# Altium PCB PCB1.PcbDoc
Units mm, origin at the board's own origin, x right, y up, seen from the top; angles counter-clockwise.
Board outline 100 x 50 mm, 2 copper layers (Top Layer, Bottom Layer); 25 components, 24 nets, 124 pads, 0 vias.
Unrouted connection lines stored in the file: 72.
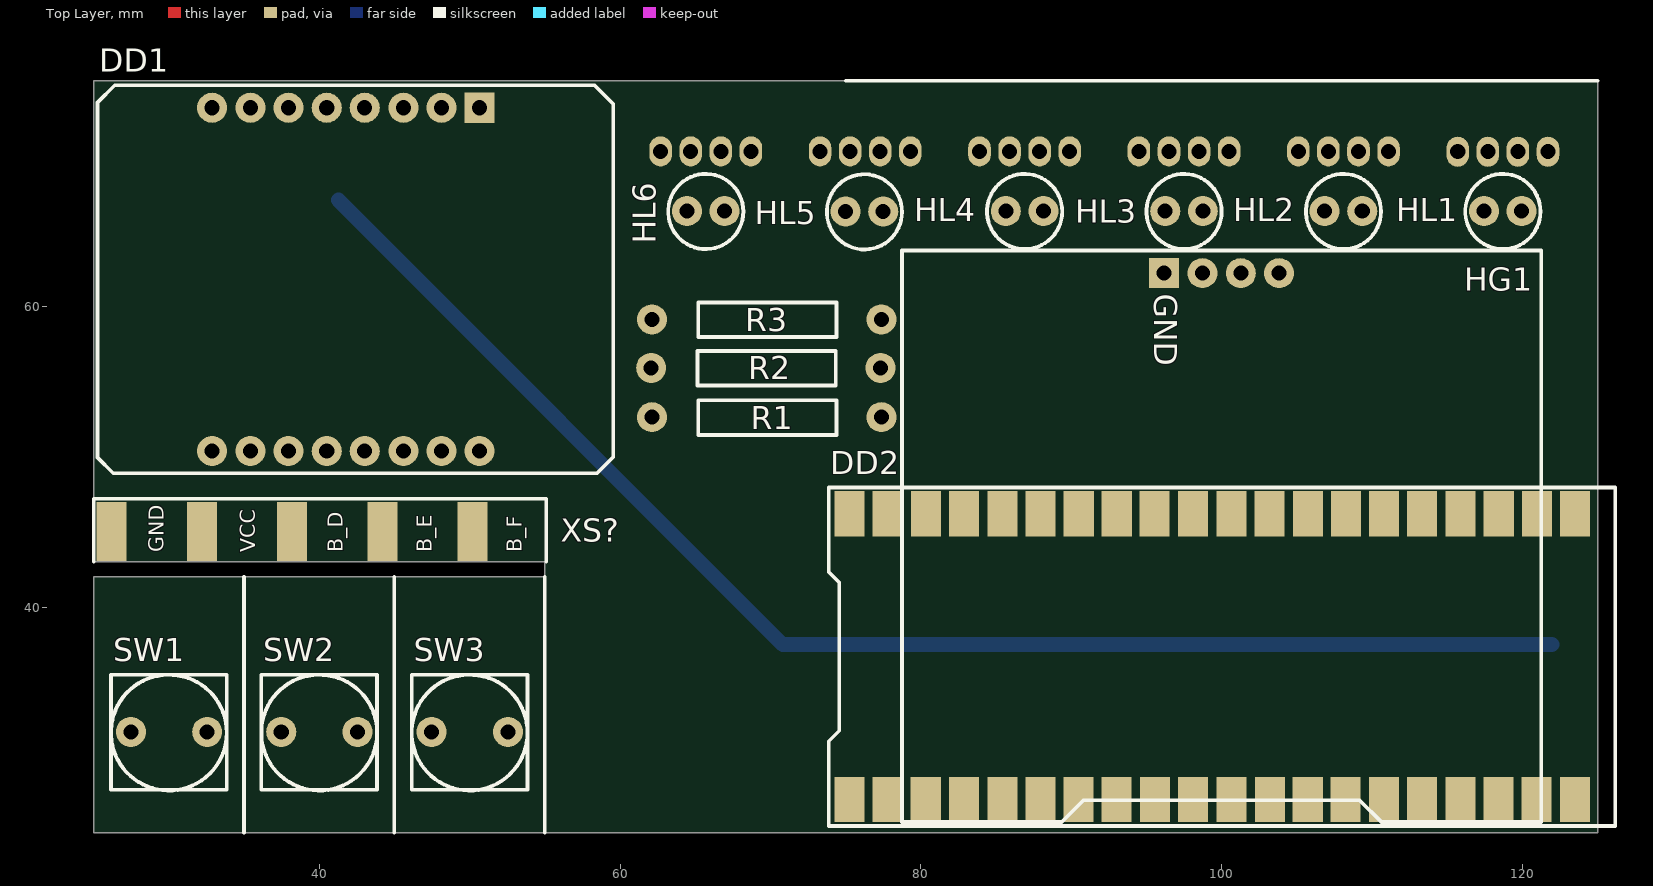
[diagram p0: Top Layer view]
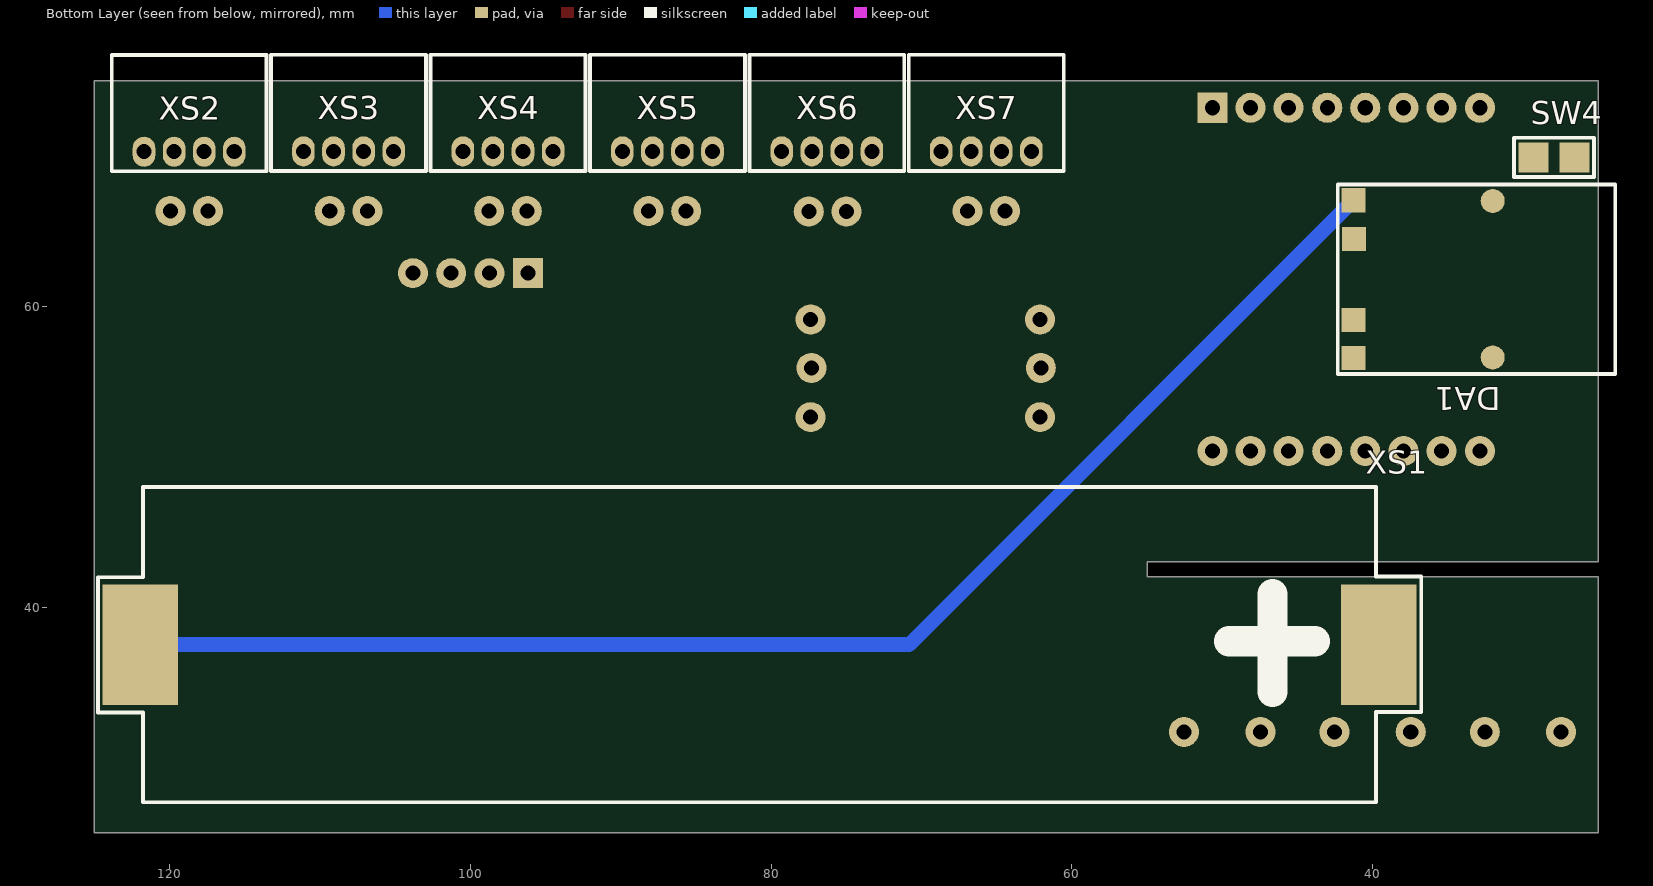
[diagram p1: Bottom Layer view, seen from below]

## Layer stack, top to bottom
Top Solder: solder mask 0.0102, Solder Resist, Dk 3.5
Top Layer: signal copper 0.0356
Dielectric 1: dielectric 0.32, FR-4, Dk 4.8
Bottom Layer: signal copper 0.0356
Bottom Solder: solder mask 0.0102, Solder Resist, Dk 3.5

## Board outline
25,25 25,42 55,42 55,43 25,43 25,75 125,75 125,25

## Design rules (kind name [scope] priority, off if disabled: settings)
Clearance [All] p1: gap=0 ignorepadtopadclearanceinfootprint=FALSE
PolygonConnect [All] p1: connectstyle=Relief reliefconductorwidth=0.254 reliefentries=4 polygonreliefangle="90 Angle" airgapwidth=0.254
RoutingVias [All] p1: holewidth=0.711 width=1.27 viastyle="Through Hole" minholewidth=0.711 minwidth=1.27 maxholewidth=0.711 maxwidth=1.27
SolderMaskExpansion [All] p1: expansion=0.102 istentingtop=FALSE
SupplyNets "Schematic Supply Nets_2" [InNet('GND')] p1: voltage=0.000
SupplyNets "Schematic Supply Nets_1" [InNet('+5V')] p2: voltage=0.000
SupplyNets "Schematic Supply Nets" [InNet('+3.3V')] p3: voltage=0.000
Width [All] p1: maxlimit=1 minlimit=0.3 preferedwidth=0.5 minimp=50.000000 maximp=50.000000 favimp=50.000000
30 further rules are at their usual default settings.

## Components (designator, comment, footprint, x,y, rotation, side; value= is the part's Value field where it differs from the comment)
DA1 "1S 4057 BMS USB C" TP4057 32.8,61.8 r0 bottom
DD1 "ESPWemos" WEMOS 42.4,61.8 r270 top
DD2 "Raspberry Pi Pico" raspberryPiPico 99.375,36.7 r0 top
HG1 "Oled I2C" OledI2C 100,44.7 r0 top
HL1 "led" LED 118.7,66.3 r0 top
HL2 "led" LED 108.1,66.3 r0 top
HL3 "led" LED 97.5,66.3 r0 top
HL4 "led" LED 86.9,66.3 r0 top
HL5 "led" LED 76.25,66.275 r0 top
HL6 "led" LED 65.7,66.3 r0 top
R1 "resistor" Resistor 69.8,52.6 r90 top
R2 "resistor" Resistor 69.747,55.877 r90 top
R3 "resistor" Resistor 69.8,59.1 r90 top
SW1 "button" button 30,31.65 r0 top
SW2 "button" button 40,31.65 r0 top
SW3 "button" button 50,31.65 r0 top
SW4 "button" PowerButton 26.6,69.9 r0 bottom
XS1 "Power" 18650РHolder 80.775,37.525 r270 bottom
XS2 "I2C" "gpio4 v2" 117.9,70.3 r180 bottom
XS3 "I2C" "gpio4 v2" 107.3,70.325 r180 bottom
XS4 "I2C" "gpio4 v2" 96.7,70.325 r180 bottom
XS5 "I2C" "gpio4 v2" 86.1,70.325 r180 bottom
XS6 "I2C" "gpio4 v2" 75.5,70.325 r180 bottom
XS7 "I2C" "gpio4 v2" 64.9,70.325 r180 bottom
XS? "Connector" ConnectionModule 26.2,45 r0 top

## Footprints (in the part's own frame and the unit in brackets; to place one, negate y for a bottom-side part, rotate by r counter-clockwise, add the part's x,y. Pads: shape width x height; smd on the part's side, far side on the other; paste and mask are expansions set on the pad)
18650РHolder [mm]
  rect 8x5 smd: 1(0.025,41.175) 2(0.025,-41.175)
  silkscreen extent -10.45,-44 10.5,44, body extent -10.3,-43.32 10.35,43.33, height 23.06
button [mm]
  round 2 hole 1: 1(-2.525,0.05) 2(2.55,0.05)
  silkscreen extent -3.85,-3.85 3.85,3.85
ConnectionModule [mm]
  rect 2x4 smd: 1(0,0) 2(6,0) 3(12,0) 4(18,0) 5(24,0)
  silkscreen extent -1.2,-2 28.9,2.2
"gpio4 v2" [mm]
  oval 1.5x2 hole 1: 1(-3.8,-0.025) 2(-1.8,-0.025) 3(0.2,-0.025) 4(2.2,-0.025)
  silkscreen extent -5.95,-1.33 4.35,6.4, body extent -5.8,-0.28 4.2,6.22, height 4.65
LED [mm]
  round 2 hole 1: 1(-1.25,0.025) 2(1.25,0.025)
  silkscreen extent -2.5,-2.5 2.5,2.5, body extent -2.5,-0.97 2.5,1.03, height 9.24
OledI2C [mm]
  rect 2x2 hole 1: 1(-3.825,17.5)
  round 2 hole 1: 2(-1.275,17.5) 3(1.275,17.5) 4(3.825,17.5) ""(1.275,17.5)
  silkscreen extent -21.25,-19 21.25,19, body extent -21.25,-19 21.25,19, height 20.1
PowerButton [mm]
  rect 2x2 smd: 1(0,0) 2(2.7,0)
  silkscreen extent -1.3,-1.3 4,1.3
raspberryPiPico [mm]
  rect 2x3 smd: 1(24.125,-9.5) 2(21.575,-9.5) 3(19.025,-9.5) 4(16.5,-9.5) 5(13.95,-9.5) 6(11.425,-9.5) 7(8.875,-9.5) 8(6.35,-9.5) 9(3.85,-9.5) 10(1.275,-9.5) 11(-1.275,-9.5) 12(-3.8,-9.5) 13(-6.375,-9.5) 14(-8.9,-9.5) 15(-11.425,-9.5) 16(-13.95,-9.5) 17(-16.5,-9.5) 18(-19.05,-9.5) 19(-21.6,-9.5) 20(-24.125,-9.5) 21(-24.125,9.5) 22(-21.575,9.5) 23(-19.025,9.5) 24(-16.5,9.5) 25(-13.95,9.5) 26(-11.425,9.5) 27(-8.875,9.5) 28(-6.35,9.5) 29(-3.85,9.5) 30(-1.275,9.5) 31(1.275,9.5) 32(3.8,9.5) 33(6.375,9.5) 34(8.9,9.5) 35(11.425,9.5) 36(13.95,9.5) 37(16.5,9.5) 38(19.05,9.5) 39(21.6,9.5) 40(24.125,9.5)
  silkscreen extent -25.5,-11.25 26.8,11.25, body extent -25.5,-10.5 26.8,10.5, height 4
Resistor [mm]
  round 2 hole 1: 1(0.025,7.675) 2(0.025,-7.575)
  silkscreen extent -1.15,-4.6 1.15,4.6, body extent -1.14,-7.92 1.15,7.92, height 2.3
TP4057 [mm]
  rect 1.6x1.6 smd: 1(8.475,5.25) 2(8.475,2.7) 3(8.45,-2.675) 4(8.475,-5.25)
  round 1.6 smd: 5(-0.775,5.2) 6(-0.775,-5.2)
  silkscreen extent -8.93,-6.3 9.53,6.3, body extent -8.78,-6 9.22,6, height 5.21
WEMOS [mm]
  round 2 hole 1: 1(11.425,-9.525) 2(11.425,-6.975) 3(11.425,-4.45) 4(11.425,-1.9) 5(11.425,0.625) 6(11.425,3.2) 7(11.425,5.725) 8(11.425,8.25) 10(-11.4,5.725) 11(-11.4,3.2) 12(-11.4,0.625) 13(-11.4,-1.9) 14(-11.4,-4.45) 15(-11.4,-6.975) 16(-11.4,-9.525)
  rect 2x2 hole 1: 9(-11.4,8.25)
  silkscreen extent -12.9,-17.15 12.9,17.15, body extent -12.9,-17.15 12.9,17.15, height 9.94

## Part data
DD1: library part ESP8266Wemos
XS2 XS3 XS4 XS5 XS6 XS7: library part GPIO4
XS?: library part ConnectionModule

## Nets (pads, with @x,y where several pads share a name; then routed paths per layer and width w, separated by ;. In a path a pad name is that pad's centre, name@x,y a point inside that pad or via, vN(x,y) a via of type N, cw(c..) or ccw(c..) an arc to the next point about the centre after c; other vN are vias at no path point)
+3.3V: DD2.36 HG1.1 HL1.1 HL2.1 HL3.1 HL4.1 HL5.1 HL6.1 XS2.1 XS3.1 XS4.1 XS5.1 XS6.1 XS7.1
+5V: DD1.9 DD2.39 SW1.2 SW2.2 SW3.2 SW4.2 XS?.2
GND: DA1.5 DD1.10 DD2.3 DD2.8 DD2.13 DD2.18 DD2.23 DD2.28 DD2.33 DD2.38 HG1.2 R1.1 R2.1 R3.1 XS2.4 XS3.4 XS4.4 XS5.4 XS6.4 XS7.4 XS?.1
NetDA1_3: DA1.3 XS1.1
NetDA1_4: DA1.4 XS1.2 | length 92.9
  Bottom Layer w1: DA1.4 70.825,37.5 XS1.2
NetDA1_6: DA1.6 SW4.1
NetDD1_15: DD1.15 DD2.21
NetDD1_16: DD1.16 DD2.22
NetDD2_1: DD2.1 HG1.4
NetDD2_2: DD2.2 HG1.3
NetDD2_6: DD2.6 XS2.2 XS3.2 XS4.2 XS5.2 XS6.2 XS7.2
NetDD2_7: DD2.7 XS2.3 XS3.3 XS4.3 XS5.3 XS6.3 XS7.3
NetDD2_9: DD2.9 XS?.5
NetDD2_10: DD2.10 XS?.4
NetDD2_11: DD2.11 DD2.12 XS?.3
NetDD2_14: DD2.14 R2.2 SW2.1
NetDD2_15: DD2.15 R1.2 SW1.1
NetDD2_16: DD2.16 HL1.2
NetDD2_17: DD2.17 HL2.2
NetDD2_19: DD2.19 HL3.2
NetDD2_20: DD2.20 HL4.2
NetDD2_24: DD2.24 HL5.2
NetDD2_25: DD2.25 HL6.2
NetR3_2: R3.2 SW3.1
pads on no net: DA1.1 DA1.2 DD1.1 DD1.2 DD1.3 DD1.4 DD1.5 DD1.6 DD1.7 DD1.8 DD1.11 DD1.12 DD1.13 DD1.14 DD2.4 DD2.5 DD2.26 DD2.27 DD2.29 DD2.30 DD2.31 DD2.32 DD2.34 DD2.35 DD2.37 DD2.40 HG1.

## Silkscreen, mask and mechanical layers (free items; w line width, h text height)
Top Overlay:
  lines w0.24: 35,25 35,42 ; 45,25 45,42 ; 55,25 55,42 ; 100,75 75,75 125,75
Mechanical 1:
  the board outline again, w0.24

## Text inside footprints (layer, text, board x,y; h text height)
HG1: Top Overlay "GND" at 95.505,60.846 h1.52 r270
XS?: Top Overlay "B_F" at 53.479,43.654 h1 r90; Top Overlay "B_E" at 47.479,43.654 h1 r90; Top Overlay "B_D" at 41.579,43.654 h1 r90; Top Overlay "VCC" at 35.746,43.654 h1 r90; Top Overlay "GND" at 29.646,43.654 h1 r90